# EAGLE board sirene (EAGLE 7.6.0)
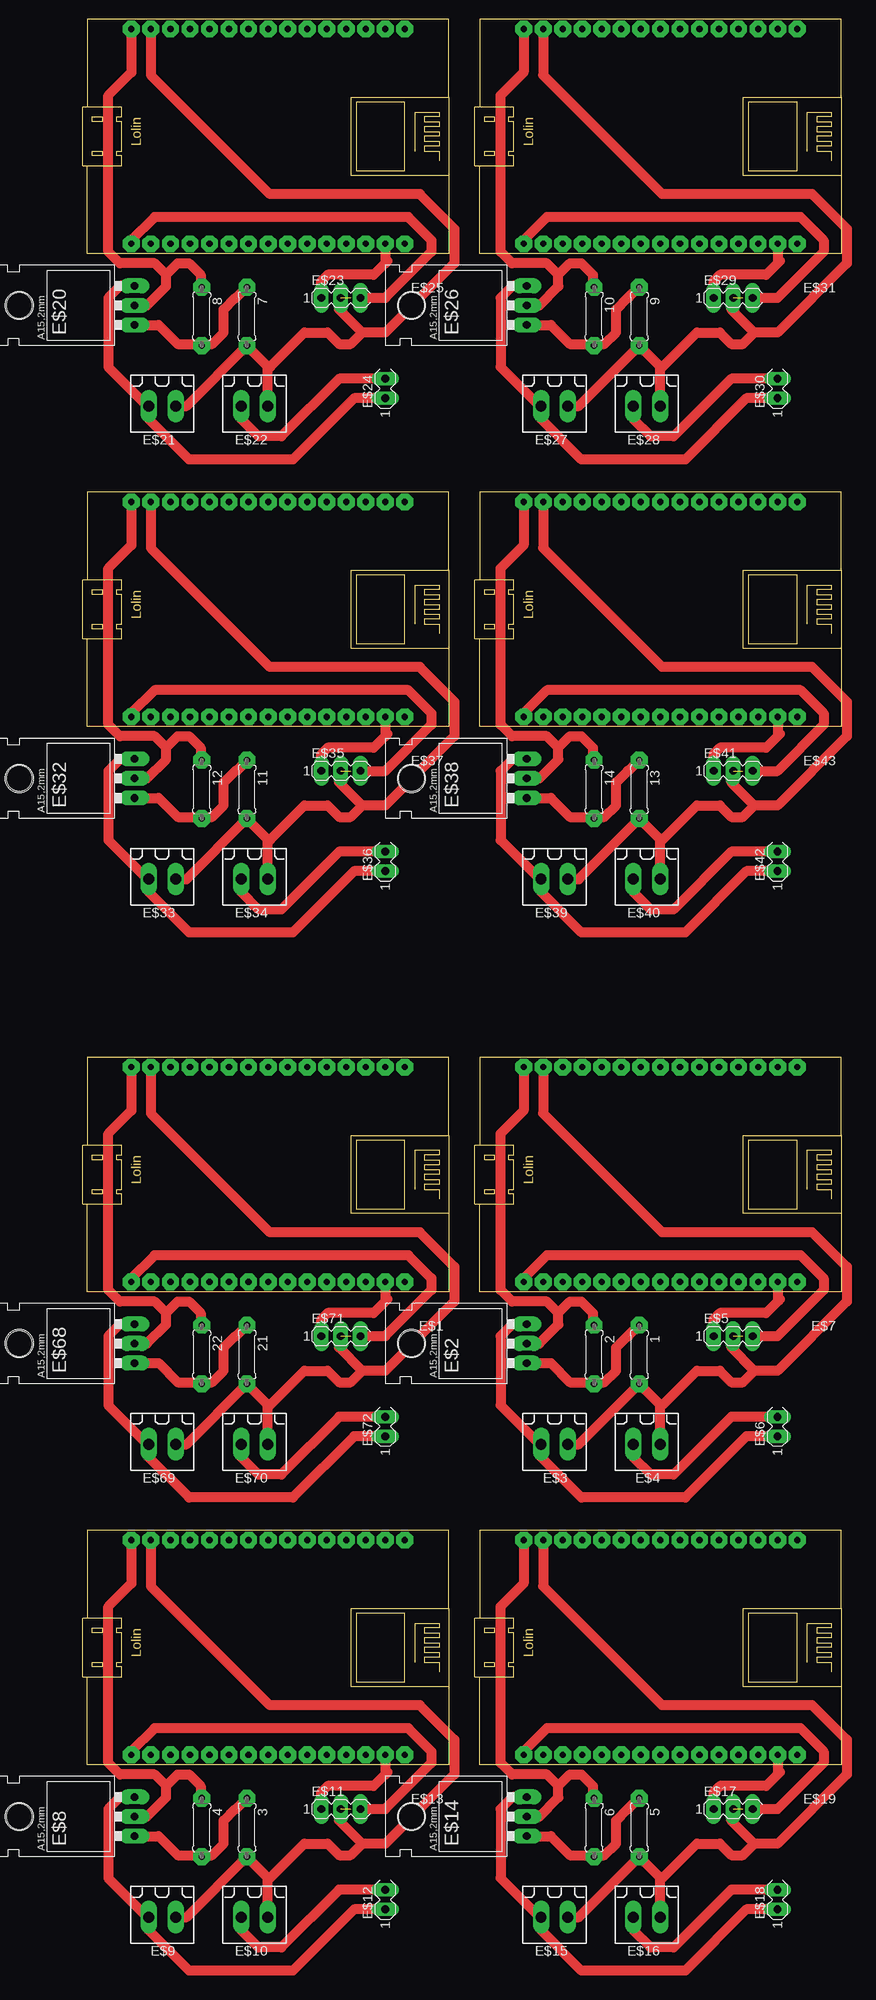
[diagram p0: board, top side]
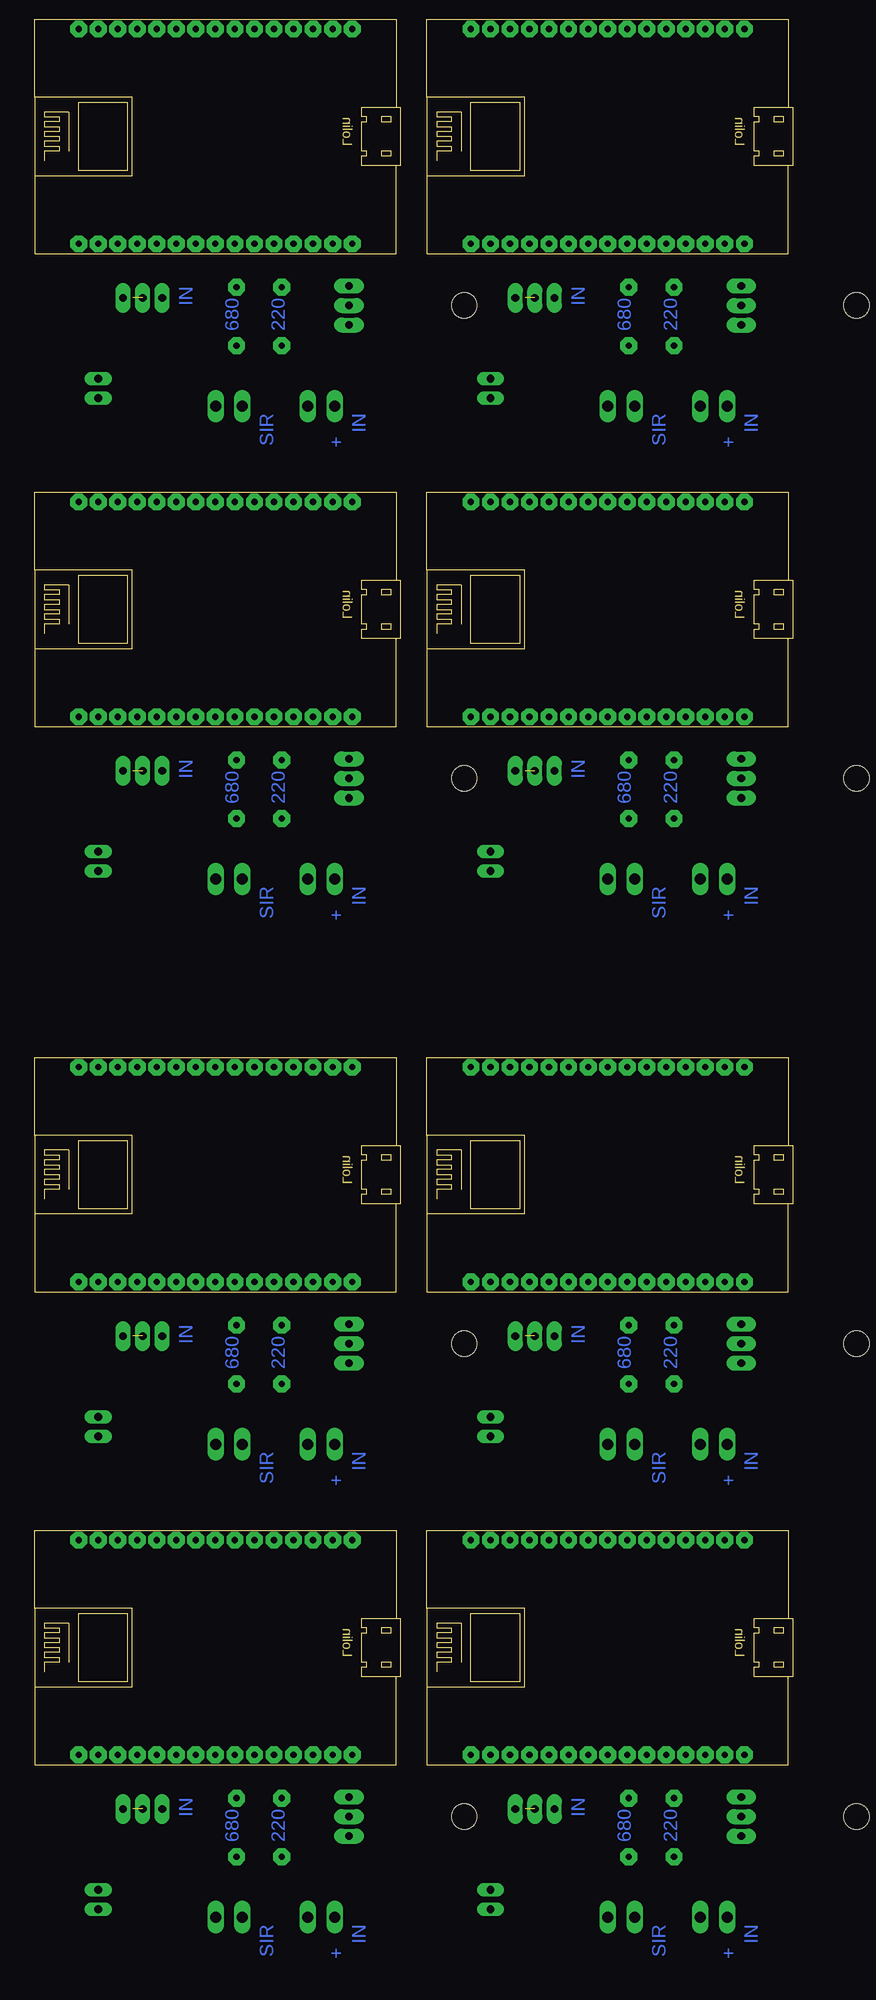
[diagram p1: board, bottom side, seen from below]

Size 98.62 x 226.98 mm. Coordinates in mm from the lower left corner, seen from the top.
Copper layers (1*16): Top 0.035mm / dielectric 1.5mm / Bottom 0.035mm
Design rules "default": minimum track width 10mil, minimum drill 24mil, track to track 8mil, track to pad 8mil, pad to pad 8mil, via to via 8mil, smd to smd 8mil, copper to edge 40mil, drill to drill 8mil, minimum pad ring 10mil, minimum via ring 8mil, stop-mask expansion 4mil, vias tented up to drill 0mil, thermal gap 10mil
Net classes: 0 default: clearance 0.205 mm

## Footprints (pad centres in the part's own frame; a part is rotated, then mirrored left to right if it is on the bottom)
0207/7 = drill 0.813 pad 2.184 octagon: 1 -3.81,0; 2 3.81,0
LOLIN = drill 0.8 pad 2.184 octagon: 3V -6.35,13.97; 3V1 16.51,13.97; 3V2 6.35,-13.97; A0 -19.05,-13.97; D0 -19.05,13.97; D1 -16.51,13.97; D2 -13.97,13.97; D3 -11.43,13.97; D4 -8.89,13.97; D5 -1.27,13.97; D6 1.27,13.97; D7 3.81,13.97; D8 6.35,13.97; EN 8.89,-13.97; G -3.81,13.97; G1 13.97,13.97; G2 13.97,-13.97; G3 3.81,-13.97; G4 -16.51,-13.97; RST 11.43,-13.97; RX 8.89,13.97; S0 -1.27,-13.97; S1 -6.35,-13.97; S2 -8.89,-13.97; S3 -11.43,-13.97; SC -3.81,-13.97; SK 1.27,-13.97; TX 11.43,13.97; VIN 16.51,-13.97; VV -13.97,-13.97
317TL = drill 1.016 pad 1.93 long: 1 -2.54,-3.81; 2 0,-3.81; 3 2.54,-3.81 | hole 3.302: 0,11.176
180G-2 = drill 1.422 long: 1 -1.75,0; 2 1.75,0
MA04-1 = drill 1.016 pad 1.93 long: 1 -3.81,0; 2 -1.27,0; 3 1.27,0
MA03-1 = drill 1.016 pad 1.778 long: 1 -2.54,0; 2 0,0

## Placement (x,y rotation side)
1  [0207/7]  72.38,53.34 270 top
2  [0207/7]  66.5,53.34 270 top
3  [0207/7]  21.38,-8.16 270 top  (outside the outline)
4  [0207/7]  15.5,-8.16 270 top  (outside the outline)
5  [0207/7]  72.38,-8.16 270 top  (outside the outline)
6  [0207/7]  66.5,-8.16 270 top  (outside the outline)
7  [0207/7]  21.38,188.34 270 top
8  [0207/7]  15.5,188.34 270 top
9  [0207/7]  72.38,188.34 270 top
10  [0207/7]  66.5,188.34 270 top
11  [0207/7]  21.38,126.84 270 top
12  [0207/7]  15.5,126.84 270 top
13  [0207/7]  72.38,126.84 270 top
14  [0207/7]  66.5,126.84 270 top
21  [0207/7]  21.38,53.34 270 top
22  [0207/7]  15.5,53.34 270 top
E$1  [LOLIN]  22.86,76.74 180 top
E$2  [317TL]  53.95,54.76 90 top
E$3  [180G-2]  61.36,41.67 180 top
E$4  [180G-2]  73.36,41.67 180 top
E$5  [MA04-1]  85.86,55.74 0 top
E$6  [MA03-1]  90.36,45.24 90 top
E$7  [LOLIN]  73.86,76.74 180 top
E$8  [317TL]  2.95,-6.74 90 top  (outside the outline)
E$9  [180G-2]  10.36,-19.83 180 top  (outside the outline)
E$10  [180G-2]  22.36,-19.83 180 top  (outside the outline)
E$11  [MA04-1]  34.86,-5.76 0 top  (outside the outline)
E$12  [MA03-1]  39.36,-16.26 90 top  (outside the outline)
E$13  [LOLIN]  22.86,15.24 180 top
E$14  [317TL]  53.95,-6.74 90 top  (outside the outline)
E$15  [180G-2]  61.36,-19.83 180 top  (outside the outline)
E$16  [180G-2]  73.36,-19.83 180 top  (outside the outline)
E$17  [MA04-1]  85.86,-5.76 0 top  (outside the outline)
E$18  [MA03-1]  90.36,-16.26 90 top  (outside the outline)
E$19  [LOLIN]  73.86,15.24 180 top
E$20  [317TL]  2.95,189.76 90 top
E$21  [180G-2]  10.36,176.67 180 top
E$22  [180G-2]  22.36,176.67 180 top
E$23  [MA04-1]  34.86,190.74 0 top
E$24  [MA03-1]  39.36,180.24 90 top
E$25  [LOLIN]  22.86,211.74 180 top
E$26  [317TL]  53.95,189.76 90 top
E$27  [180G-2]  61.36,176.67 180 top
E$28  [180G-2]  73.36,176.67 180 top
E$29  [MA04-1]  85.86,190.74 0 top
E$30  [MA03-1]  90.36,180.24 90 top
E$31  [LOLIN]  73.86,211.74 180 top
E$32  [317TL]  2.95,128.26 90 top
E$33  [180G-2]  10.36,115.17 180 top
E$34  [180G-2]  22.36,115.17 180 top
E$35  [MA04-1]  34.86,129.24 0 top
E$36  [MA03-1]  39.36,118.74 90 top
E$37  [LOLIN]  22.86,150.24 180 top
E$38  [317TL]  53.95,128.26 90 top
E$39  [180G-2]  61.36,115.17 180 top
E$40  [180G-2]  73.36,115.17 180 top
E$41  [MA04-1]  85.86,129.24 0 top
E$42  [MA03-1]  90.36,118.74 90 top
E$43  [LOLIN]  73.86,150.24 180 top
E$68  [317TL]  2.95,54.76 90 top
E$69  [180G-2]  10.36,41.67 180 top
E$70  [180G-2]  22.36,41.67 180 top
E$71  [MA04-1]  34.86,55.74 0 top
E$72  [MA03-1]  39.36,45.24 90 top

## Library data of the parts
1-14 21 22 = rcl
E$1 E$7 E$13 E$19 E$25 E$31 E$37 E$43 = Lolin
E$2 E$8 E$14 E$20 E$26 E$32 E$38 E$68 = v-reg
E$3 E$4 E$9 E$10 E$15 E$16 E$21 E$22 E$27 E$28 E$33 E$34 E$39 E$40 E$69 E$70 = con-weidmueller-sl35
E$5 E$6 E$11 E$12 E$17 E$18 E$23 E$24 E$29 E$30 E$35 E$36 E$41 E$42 E$71 E$72 = con-lstb

## Nets
S$1: E$2.3 E$3.2 E$6.1
S$2: 2.1 E$2.2 E$7.VIN
S$3: 1.1 2.2 E$2.1
S$4: E$4.2 E$6.2
S$5: E$5.3 E$7.3V1
S$7: E$5.1 E$7.D1
S$8: 1.2 E$3.1 E$4.1 E$5.2 E$7.G2
S$9: E$8.3 E$9.2 E$12.1
S$11: 4.1 E$8.2 E$13.VIN
S$12: 3.1 4.2 E$8.1
S$13: E$10.2 E$12.2
S$14: E$11.3 E$13.3V1
S$15: E$11.1 E$13.D1
S$16: 3.2 E$9.1 E$10.1 E$11.2 E$13.G2
S$17: E$14.3 E$15.2 E$18.1
S$18: 6.1 E$14.2 E$19.VIN
S$19: 5.1 6.2 E$14.1
S$20: E$16.2 E$18.2
S$21: E$17.3 E$19.3V1
S$22: E$17.1 E$19.D1
S$23: 5.2 E$15.1 E$16.1 E$17.2 E$19.G2
S$24: E$20.3 E$21.2 E$24.1
S$25: 8.1 E$20.2 E$25.VIN
S$26: 7.1 8.2 E$20.1
S$27: E$22.2 E$24.2
S$28: E$23.3 E$25.3V1
S$29: E$23.1 E$25.D1
S$30: 7.2 E$21.1 E$22.1 E$23.2 E$25.G2
S$31: E$26.3 E$27.2 E$30.1
S$32: 10.1 E$26.2 E$31.VIN
S$33: 9.1 10.2 E$26.1
S$34: E$28.2 E$30.2
S$35: E$29.3 E$31.3V1
S$36: E$29.1 E$31.D1
S$37: 9.2 E$27.1 E$28.1 E$29.2 E$31.G2
S$38: E$32.3 E$33.2 E$36.1
S$39: 12.1 E$32.2 E$37.VIN
S$40: 11.1 12.2 E$32.1
S$41: E$34.2 E$36.2
S$42: E$35.3 E$37.3V1
S$43: E$35.1 E$37.D1
S$44: 11.2 E$33.1 E$34.1 E$35.2 E$37.G2
S$45: E$38.3 E$39.2 E$42.1
S$46: 14.1 E$38.2 E$43.VIN
S$47: 13.1 14.2 E$38.1
S$48: E$40.2 E$42.2
S$49: E$41.3 E$43.3V1
S$50: E$41.1 E$43.D1
S$51: 13.2 E$39.1 E$40.1 E$41.2 E$43.G2
S$80: E$68.3 E$69.2 E$72.1
S$81: 22.1 E$1.VIN E$68.2
S$82: 21.1 22.2 E$68.1
S$83: E$70.2 E$72.2
S$84: E$1.3V1 E$71.3
S$85: E$1.D1 E$71.1
S$86: 21.2 E$1.G2 E$69.1 E$70.1 E$71.2

## Tracks (layer width: path | path; a pad name or v marks a point on that pad's centre or on a via)
S$1
  Top 1.27: 57.7,57.24 E$2.3 55.92,57.3 54.36,55.74 54.36,46.74 59.43,41.67 E$3.2 59.61,39.99 64.86,34.74 78.36,34.74 86.32,42.7 E$6.1
S$2
  Top 1.27: E$2.2 59.38,54.76 61.86,57.24 61.86,58.74 | 61.86,58.74 63.36,60.24 64.86,60.24 66.36,58.74 66.36,57.29 2.1 | 61.86,58.74 60.36,60.24 55.86,60.24 54.36,61.74 54.36,82.08 57.35,85.07 E$7.VIN
S$3
  Top 1.27: E$2.1 60.88,52.22 63.36,49.74 66.29,49.74 | 66.29,49.74 2.2 | 66.29,49.74 67.86,49.74 69.36,51.24 69.36,54.24 70.86,55.74 70.97,55.74 1.1
S$4
  Top 1.27: E$4.2 71.61,39.99 73.86,37.74 76.86,37.74 84.36,45.24 E$6.2
S$5
  Top 1.27: E$5.3 90.36,55.74 96.36,61.74 96.36,63.24 93.36,66.24 60.36,66.24 57.35,63.23
  Top 1.422: E$7.3V1 57.35,63.23
S$7
  Top 1.27: E$5.1 82.05,57.93 82.86,58.74 88.86,58.74 90.37,60.25 | 90.66,60.54 90.37,60.25 | E$7.D1 90.37,60.25
S$8  (1 unrouted)
  Top 1.27: 1.2 72.15,49.53 | E$3.1 64.52,41.67 1.2 | E$4.1 75.11,46.8 | 75.11,46.8 1.2 | 87.36,51.24 90.36,51.24 99.36,60.24 99.36,64.74 94.86,69.24 75.36,69.24 59.89,84.71 E$7.G2 | 87.36,51.24 84.36,54.24 84.36,55.51 E$5.2 | 75.11,46.8 75.42,46.8 79.86,51.24 82.86,51.24 84.36,49.74 85.86,49.74 87.36,51.24
S$9
  Top 1.27: 6.7,-4.26 E$8.3 4.92,-4.2 3.36,-5.76 3.36,-14.76 8.43,-19.83 E$9.2 8.61,-21.51 13.86,-26.76 27.36,-26.76 35.32,-18.8 E$12.1
S$11
  Top 1.27: E$8.2 8.38,-6.74 10.86,-4.26 10.86,-2.76 | 10.86,-2.76 12.36,-1.26 13.86,-1.26 15.36,-2.76 15.36,-4.21 4.1 | 10.86,-2.76 9.36,-1.26 4.86,-1.26 3.36,0.24 3.36,20.58 6.35,23.57 E$13.VIN
S$12
  Top 1.27: E$8.1 9.88,-9.28 12.36,-11.76 15.29,-11.76 | 15.29,-11.76 4.2 | 15.29,-11.76 16.86,-11.76 18.36,-10.26 18.36,-7.26 19.86,-5.76 19.97,-5.76 3.1
S$13
  Top 1.27: E$10.2 20.61,-21.51 22.86,-23.76 25.86,-23.76 33.36,-16.26 E$12.2
S$14
  Top 1.27: E$11.3 39.36,-5.76 45.36,0.24 45.36,1.74 42.36,4.74 9.36,4.74 6.35,1.73
  Top 1.422: E$13.3V1 6.35,1.73
S$15
  Top 1.27: E$11.1 31.05,-3.57 31.86,-2.76 37.86,-2.76 39.37,-1.25 | 39.66,-0.96 39.37,-1.25 | E$13.D1 39.37,-1.25
S$16  (1 unrouted)
  Top 1.27: 3.2 21.15,-11.97 | E$9.1 13.52,-19.83 3.2 | E$10.1 24.11,-14.7 | 24.11,-14.7 3.2 | 36.36,-10.26 39.36,-10.26 48.36,-1.26 48.36,3.24 43.86,7.74 24.36,7.74 8.89,23.21 E$13.G2 | 36.36,-10.26 33.36,-7.26 33.36,-5.99 E$11.2 | 24.11,-14.7 24.42,-14.7 28.86,-10.26 31.86,-10.26 33.36,-11.76 34.86,-11.76 36.36,-10.26
S$17
  Top 1.27: 57.7,-4.26 E$14.3 55.92,-4.2 54.36,-5.76 54.36,-14.76 59.43,-19.83 E$15.2 59.61,-21.51 64.86,-26.76 78.36,-26.76 86.32,-18.8 E$18.1
S$18
  Top 1.27: E$14.2 59.38,-6.74 61.86,-4.26 61.86,-2.76 | 61.86,-2.76 63.36,-1.26 64.86,-1.26 66.36,-2.76 66.36,-4.21 6.1 | 61.86,-2.76 60.36,-1.26 55.86,-1.26 54.36,0.24 54.36,20.58 57.35,23.57 E$19.VIN
S$19
  Top 1.27: E$14.1 60.88,-9.28 63.36,-11.76 66.29,-11.76 | 66.29,-11.76 6.2 | 66.29,-11.76 67.86,-11.76 69.36,-10.26 69.36,-7.26 70.86,-5.76 70.97,-5.76 5.1
S$20
  Top 1.27: E$16.2 71.61,-21.51 73.86,-23.76 76.86,-23.76 84.36,-16.26 E$18.2
S$21
  Top 1.27: E$17.3 90.36,-5.76 96.36,0.24 96.36,1.74 93.36,4.74 60.36,4.74 57.35,1.73
  Top 1.422: E$19.3V1 57.35,1.73
S$22
  Top 1.27: E$17.1 82.05,-3.57 82.86,-2.76 88.86,-2.76 90.37,-1.25 | 90.66,-0.96 90.37,-1.25 | E$19.D1 90.37,-1.25
S$23  (1 unrouted)
  Top 1.27: 5.2 72.15,-11.97 | E$15.1 64.52,-19.83 5.2 | E$16.1 75.11,-14.7 | 75.11,-14.7 5.2 | 87.36,-10.26 90.36,-10.26 99.36,-1.26 99.36,3.24 94.86,7.74 75.36,7.74 59.89,23.21 E$19.G2 | 87.36,-10.26 84.36,-7.26 84.36,-5.99 E$17.2 | 75.11,-14.7 75.42,-14.7 79.86,-10.26 82.86,-10.26 84.36,-11.76 85.86,-11.76 87.36,-10.26
S$24
  Top 1.27: 6.7,192.24 E$20.3 4.92,192.3 3.36,190.74 3.36,181.74 8.43,176.67 E$21.2 8.61,174.99 13.86,169.74 27.36,169.74 35.32,177.7 E$24.1
S$25
  Top 1.27: E$20.2 8.38,189.76 10.86,192.24 10.86,193.74 | 10.86,193.74 12.36,195.24 13.86,195.24 15.36,193.74 15.36,192.29 8.1 | 10.86,193.74 9.36,195.24 4.86,195.24 3.36,196.74 3.36,217.08 6.35,220.07 E$25.VIN
S$26
  Top 1.27: E$20.1 9.88,187.22 12.36,184.74 15.29,184.74 | 15.29,184.74 8.2 | 15.29,184.74 16.86,184.74 18.36,186.24 18.36,189.24 19.86,190.74 19.97,190.74 7.1
S$27
  Top 1.27: E$22.2 20.61,174.99 22.86,172.74 25.86,172.74 33.36,180.24 E$24.2
S$28
  Top 1.27: E$23.3 39.36,190.74 45.36,196.74 45.36,198.24 42.36,201.24 9.36,201.24 6.35,198.23
  Top 1.422: E$25.3V1 6.35,198.23
S$29
  Top 1.27: E$23.1 31.05,192.93 31.86,193.74 37.86,193.74 39.37,195.25 | 39.66,195.54 39.37,195.25 | E$25.D1 39.37,195.25
S$30  (1 unrouted)
  Top 1.27: 7.2 21.15,184.53 | E$21.1 13.52,176.67 7.2 | E$22.1 24.11,181.8 | 24.11,181.8 7.2 | 36.36,186.24 39.36,186.24 48.36,195.24 48.36,199.74 43.86,204.24 24.36,204.24 8.89,219.71 E$25.G2 | 36.36,186.24 33.36,189.24 33.36,190.51 E$23.2 | 24.11,181.8 24.42,181.8 28.86,186.24 31.86,186.24 33.36,184.74 34.86,184.74 36.36,186.24
S$31
  Top 1.27: 57.7,192.24 E$26.3 55.92,192.3 54.36,190.74 54.36,181.74 59.43,176.67 E$27.2 59.61,174.99 64.86,169.74 78.36,169.74 86.32,177.7 E$30.1
S$32
  Top 1.27: E$26.2 59.38,189.76 61.86,192.24 61.86,193.74 | 61.86,193.74 63.36,195.24 64.86,195.24 66.36,193.74 66.36,192.29 10.1 | 61.86,193.74 60.36,195.24 55.86,195.24 54.36,196.74 54.36,217.08 57.35,220.07 E$31.VIN
S$33
  Top 1.27: E$26.1 60.88,187.22 63.36,184.74 66.29,184.74 | 66.29,184.74 10.2 | 66.29,184.74 67.86,184.74 69.36,186.24 69.36,189.24 70.86,190.74 70.97,190.74 9.1
S$34
  Top 1.27: E$28.2 71.61,174.99 73.86,172.74 76.86,172.74 84.36,180.24 E$30.2
S$35
  Top 1.27: E$29.3 90.36,190.74 96.36,196.74 96.36,198.24 93.36,201.24 60.36,201.24 57.35,198.23
  Top 1.422: E$31.3V1 57.35,198.23
S$36
  Top 1.27: E$29.1 82.05,192.93 82.86,193.74 88.86,193.74 90.37,195.25 | 90.66,195.54 90.37,195.25 | E$31.D1 90.37,195.25
S$37  (1 unrouted)
  Top 1.27: 9.2 72.15,184.53 | E$27.1 64.52,176.67 9.2 | E$28.1 75.11,181.8 | 75.11,181.8 9.2 | 87.36,186.24 90.36,186.24 99.36,195.24 99.36,199.74 94.86,204.24 75.36,204.24 59.89,219.71 E$31.G2 | 87.36,186.24 84.36,189.24 84.36,190.51 E$29.2 | 75.11,181.8 75.42,181.8 79.86,186.24 82.86,186.24 84.36,184.74 85.86,184.74 87.36,186.24
S$38
  Top 1.27: 6.7,130.74 E$32.3 4.92,130.8 3.36,129.24 3.36,120.24 8.43,115.17 E$33.2 8.61,113.49 13.86,108.24 27.36,108.24 35.32,116.2 E$36.1
S$39
  Top 1.27: E$32.2 8.38,128.26 10.86,130.74 10.86,132.24 | 10.86,132.24 12.36,133.74 13.86,133.74 15.36,132.24 15.36,130.79 12.1 | 10.86,132.24 9.36,133.74 4.86,133.74 3.36,135.24 3.36,155.58 6.35,158.57 E$37.VIN
S$40
  Top 1.27: E$32.1 9.88,125.72 12.36,123.24 15.29,123.24 | 15.29,123.24 12.2 | 15.29,123.24 16.86,123.24 18.36,124.74 18.36,127.74 19.86,129.24 19.97,129.24 11.1
S$41
  Top 1.27: E$34.2 20.61,113.49 22.86,111.24 25.86,111.24 33.36,118.74 E$36.2
S$42
  Top 1.27: E$35.3 39.36,129.24 45.36,135.24 45.36,136.74 42.36,139.74 9.36,139.74 6.35,136.73
  Top 1.422: E$37.3V1 6.35,136.73
S$43
  Top 1.27: E$35.1 31.05,131.43 31.86,132.24 37.86,132.24 39.37,133.75 | 39.66,134.04 39.37,133.75 | E$37.D1 39.37,133.75
S$44  (1 unrouted)
  Top 1.27: 11.2 21.15,123.03 | E$33.1 13.52,115.17 11.2 | E$34.1 24.11,120.3 | 24.11,120.3 11.2 | 36.36,124.74 39.36,124.74 48.36,133.74 48.36,138.24 43.86,142.74 24.36,142.74 8.89,158.21 E$37.G2 | 36.36,124.74 33.36,127.74 33.36,129.01 E$35.2 | 24.11,120.3 24.42,120.3 28.86,124.74 31.86,124.74 33.36,123.24 34.86,123.24 36.36,124.74
S$45
  Top 1.27: 57.7,130.74 E$38.3 55.92,130.8 54.36,129.24 54.36,120.24 59.43,115.17 E$39.2 59.61,113.49 64.86,108.24 78.36,108.24 86.32,116.2 E$42.1
S$46
  Top 1.27: E$38.2 59.38,128.26 61.86,130.74 61.86,132.24 | 61.86,132.24 63.36,133.74 64.86,133.74 66.36,132.24 66.36,130.79 14.1 | 61.86,132.24 60.36,133.74 55.86,133.74 54.36,135.24 54.36,155.58 57.35,158.57 E$43.VIN
S$47
  Top 1.27: E$38.1 60.88,125.72 63.36,123.24 66.29,123.24 | 66.29,123.24 14.2 | 66.29,123.24 67.86,123.24 69.36,124.74 69.36,127.74 70.86,129.24 70.97,129.24 13.1
S$48
  Top 1.27: E$40.2 71.61,113.49 73.86,111.24 76.86,111.24 84.36,118.74 E$42.2
S$49
  Top 1.27: E$41.3 90.36,129.24 96.36,135.24 96.36,136.74 93.36,139.74 60.36,139.74 57.35,136.73
  Top 1.422: E$43.3V1 57.35,136.73
S$50
  Top 1.27: E$41.1 82.05,131.43 82.86,132.24 88.86,132.24 90.37,133.75 | 90.66,134.04 90.37,133.75 | E$43.D1 90.37,133.75
S$51  (1 unrouted)
  Top 1.27: 13.2 72.15,123.03 | E$39.1 64.52,115.17 13.2 | E$40.1 75.11,120.3 | 75.11,120.3 13.2 | 87.36,124.74 90.36,124.74 99.36,133.74 99.36,138.24 94.86,142.74 75.36,142.74 59.89,158.21 E$43.G2 | 87.36,124.74 84.36,127.74 84.36,129.01 E$41.2 | 75.11,120.3 75.42,120.3 79.86,124.74 82.86,124.74 84.36,123.24 85.86,123.24 87.36,124.74
S$80
  Top 1.27: 6.7,57.24 E$68.3 4.92,57.3 3.36,55.74 3.36,46.74 8.43,41.67 E$69.2 8.61,39.99 13.86,34.74 27.36,34.74 35.32,42.7 E$72.1
S$81
  Top 1.27: E$68.2 8.38,54.76 10.86,57.24 10.86,58.74 | 10.86,58.74 12.36,60.24 13.86,60.24 15.36,58.74 15.36,57.29 22.1 | 10.86,58.74 9.36,60.24 4.86,60.24 3.36,61.74 3.36,82.08 6.35,85.07 E$1.VIN
S$82
  Top 1.27: E$68.1 9.88,52.22 12.36,49.74 15.29,49.74 | 15.29,49.74 22.2 | 15.29,49.74 16.86,49.74 18.36,51.24 18.36,54.24 19.86,55.74 19.97,55.74 21.1
S$83
  Top 1.27: E$70.2 20.61,39.99 22.86,37.74 25.86,37.74 33.36,45.24 E$72.2
S$84
  Top 1.27: E$71.3 39.36,55.74 45.36,61.74 45.36,63.24 42.36,66.24 9.36,66.24 6.35,63.23
  Top 1.422: E$1.3V1 6.35,63.23
S$85
  Top 1.27: E$71.1 31.05,57.93 31.86,58.74 37.86,58.74 39.37,60.25 | 39.66,60.54 39.37,60.25 | E$1.D1 39.37,60.25
S$86  (1 unrouted)
  Top 1.27: 21.2 21.15,49.53 | E$69.1 13.52,41.67 21.2 | E$70.1 24.11,46.8 | 24.11,46.8 21.2 | 36.36,51.24 39.36,51.24 48.36,60.24 48.36,64.74 43.86,69.24 24.36,69.24 8.89,84.71 E$1.G2 | 36.36,51.24 33.36,54.24 33.36,55.51 E$71.2 | 24.11,46.8 24.42,46.8 28.86,51.24 31.86,51.24 33.36,49.74 34.86,49.74 36.36,51.24

## Text on the board
Bottom: IN | IN | 220 | 680 | 220 | 680 | IN | SIR | IN | SIR | + | + | IN | IN | 220 | 680 | 220 | 680 | IN | SIR | IN | SIR | + | + | IN | IN | 220 | 680 | 220 | 680 | IN | SIR | IN | SIR | + | + | IN | IN | 220 | 680 | 220 | 680 | IN | SIR | IN | SIR | + | +